# Altium PCB Ctrl.PcbDoc
Units mm, origin at the board's own origin, x right, y up, seen from the top; angles counter-clockwise.
Board outline 152.4 x 101.6 mm, 2 copper layers (Top Layer, Bottom Layer), stack 1.671 mm thick; 13 components, 113 nets, 140 pads, 207 vias.
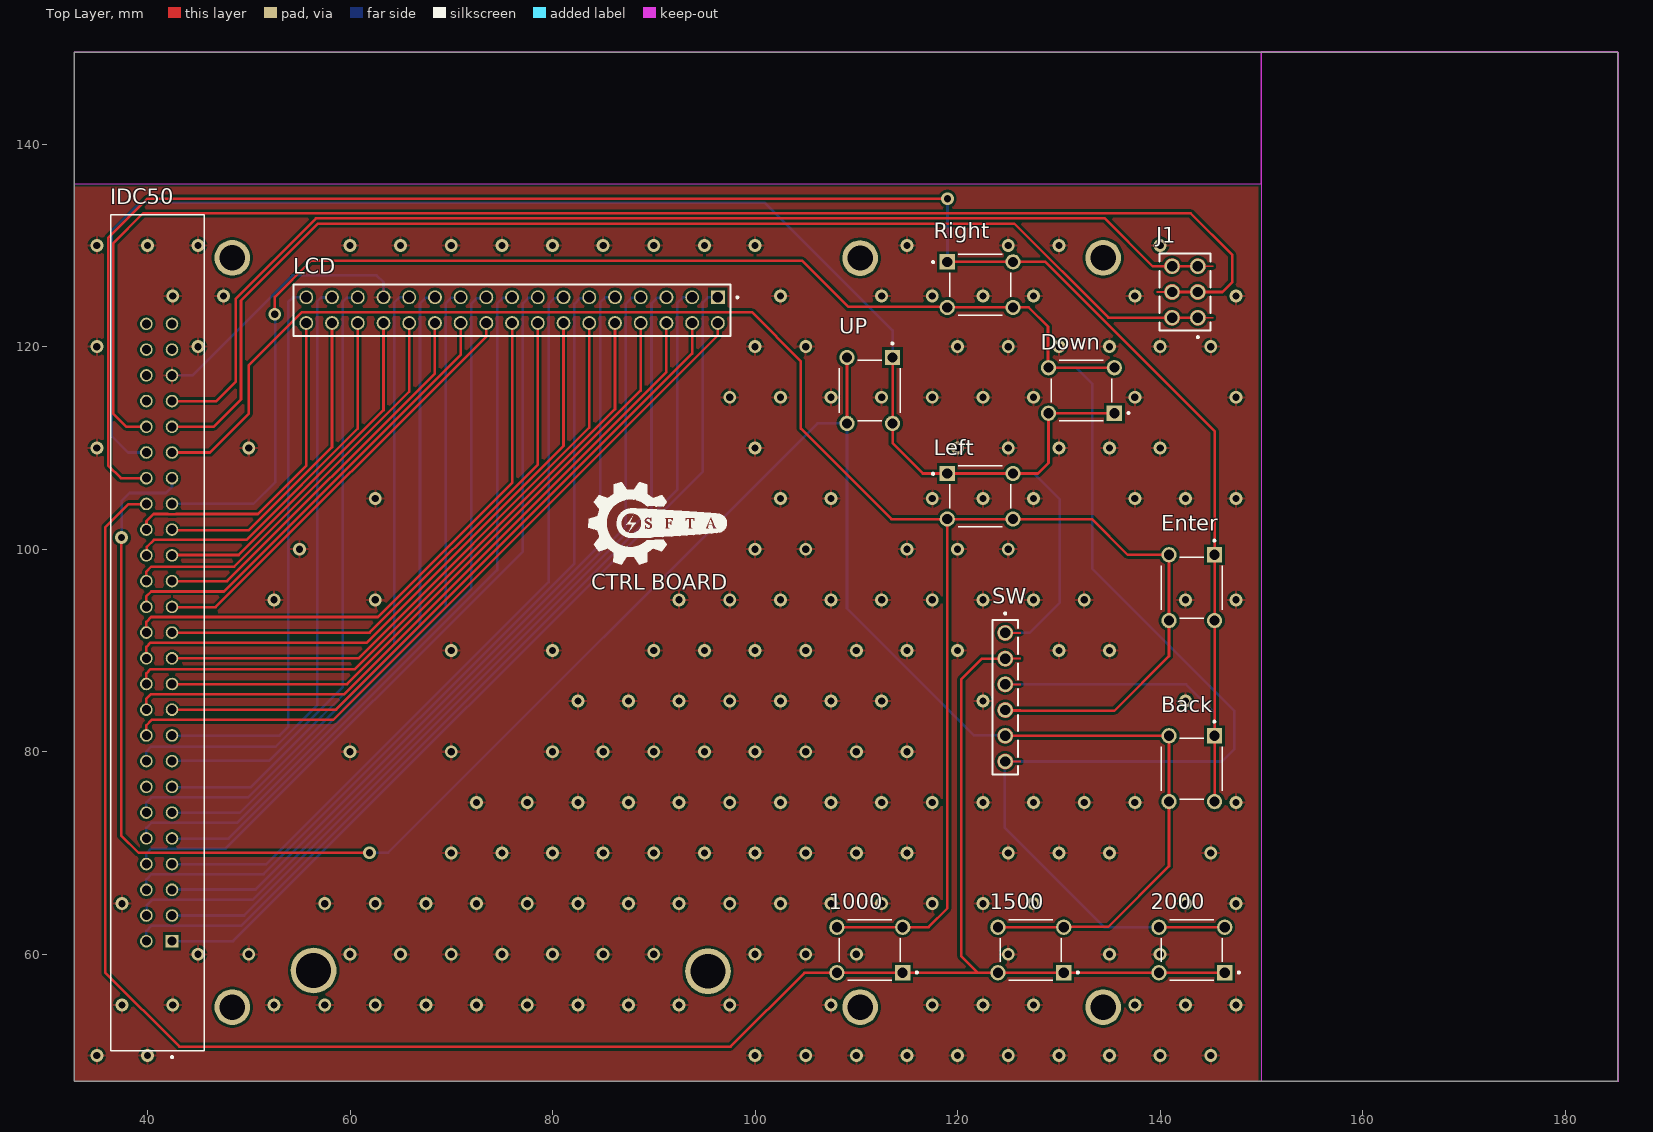
[diagram p0: Top Layer view]
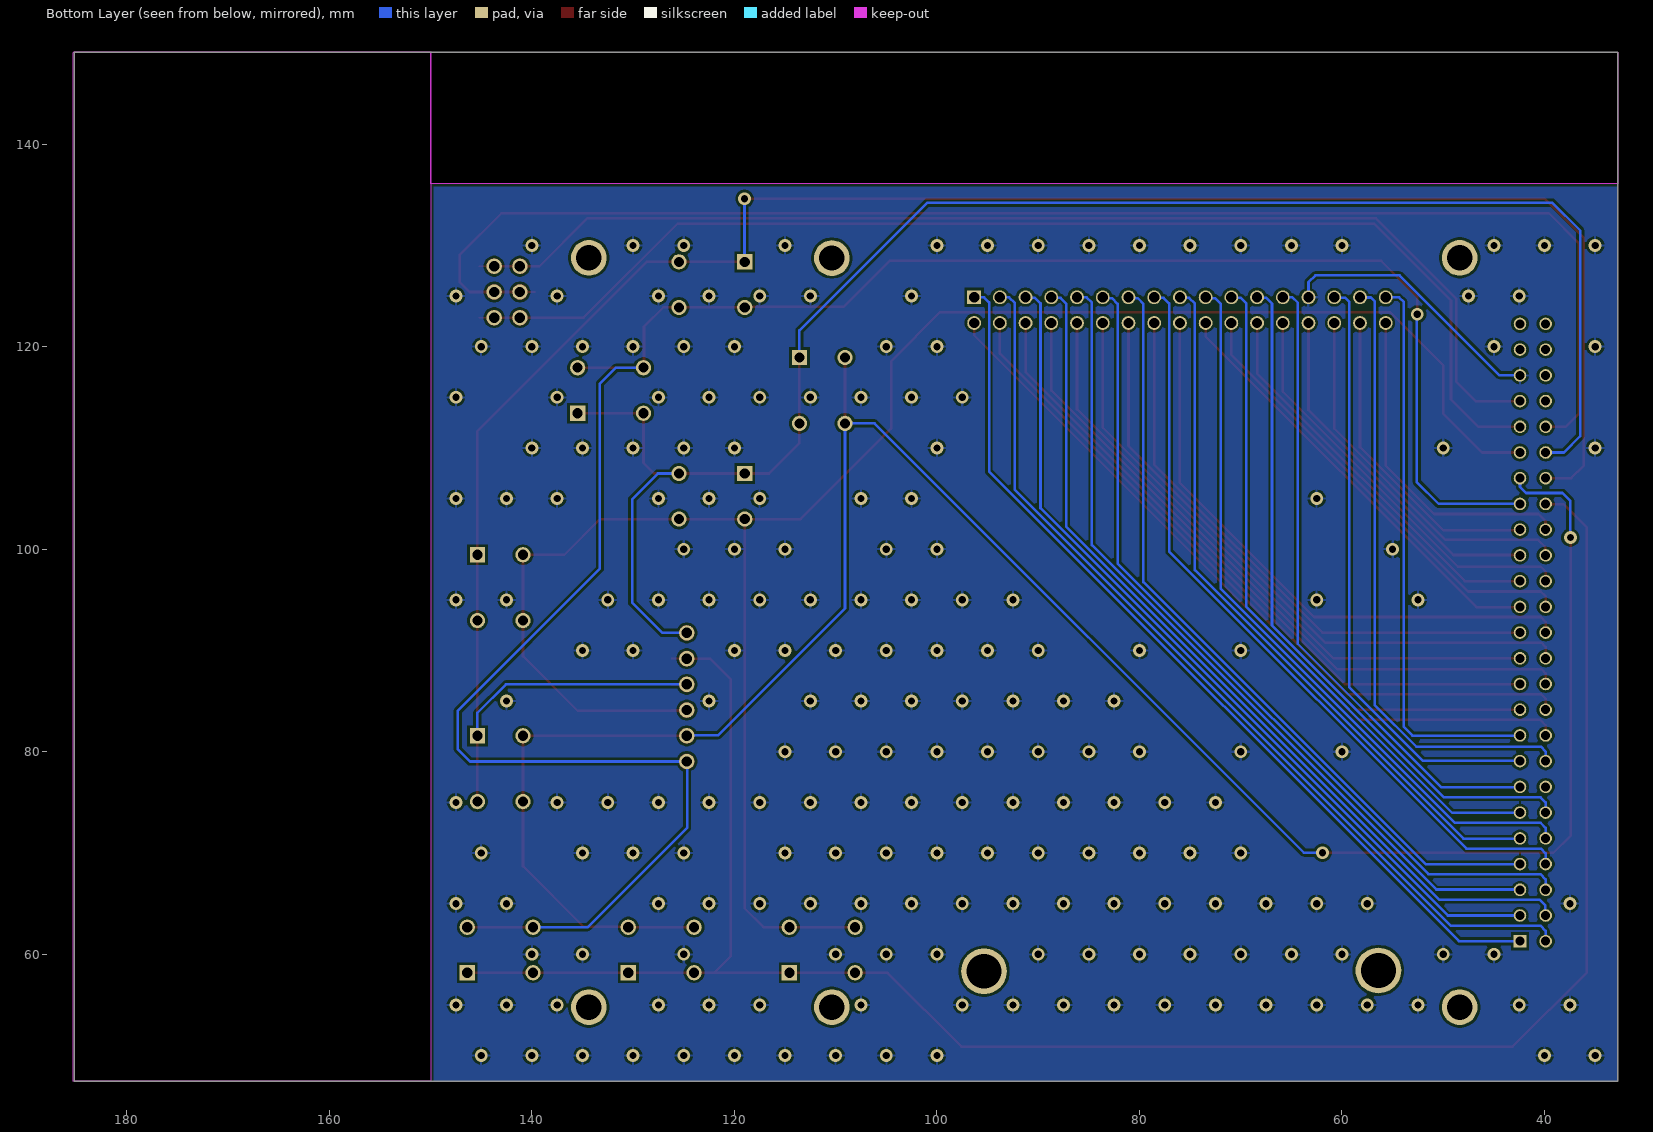
[diagram p1: Bottom Layer view, seen from below]
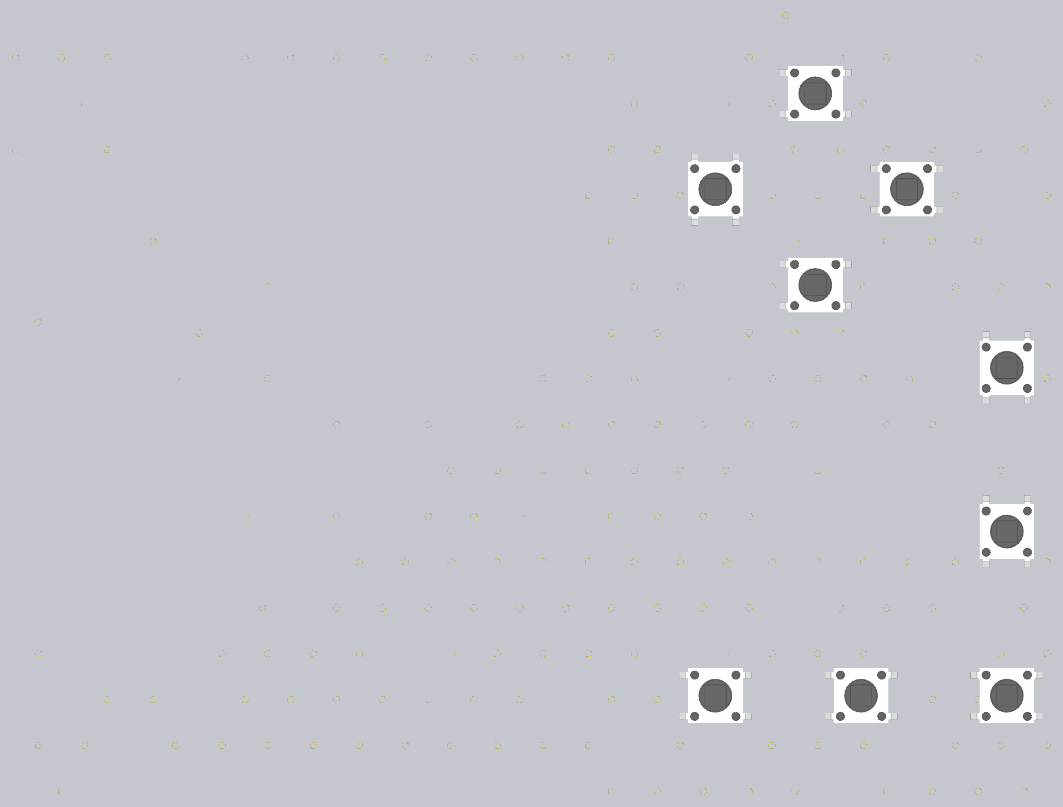
[diagram p2: 3D render of the assembled board from above, using the file's embedded part models]

## Layer stack, top to bottom
Top Solder: solder mask 0.0102, Solder Resist, Dk 3.5
Top Layer: signal copper 0.0356
Dielectric 1: dielectric 1.6, FR-4, Dk 4.8
Bottom Layer: signal copper 0.0356
Bottom Solder: solder mask 0.0102, Solder Resist, Dk 3.5

## Board outline
32.781,47.469 185.181,47.469 185.181,149.069 32.781,149.069
cut-out: 149.962,149.087 149.962,47.487 150,47.45 185.275,47.45 185.275,149.025 185.2,149.1 149.975,149.1
cut-out: 32.775,136.075 149.975,136.075 149.975,149.1 149.95,149.075 32.775,149.075

## Design rules (kind name [scope] priority, off if disabled: settings)
AssemblyTestPointUsage [All] p1: isadvanced=TRUE
AssemblyTestpoint [All] p1: isadvanced=TRUE testpointundercomponent=TRUE minsize=1.016 maxsize=2.54 preferedsize=1.524 minholesize=0 maxholesize=1.016 preferedholesize=0.813 testpointgrid=0.025 usegrid=TRUE gridtolerance=0 allowsidetop=TRUE allowsidebottom=TRUE
Clearance Clearance_1 [OnMid vs OnMid] p1: gap=0.254 ignorepadtopadclearanceinfootprint=FALSE sourcerule=37 cellrowname=All cellrowtype=0 cellcolname=All cellcoltype=0 innerlayers=TRUE
Clearance Clearance_2 [(ExistsOnLayer('Top Layer') Or ExistsOnLayer('Bottom Layer')) vs (ExistsOnLayer('Top Layer') Or ExistsOnLayer('Bottom Layer'))] p2: gap=0.254 ignorepadtopadclearanceinfootprint=FALSE sourcerule=37 cellrowname=All cellrowtype=0 cellcolname=All cellcoltype=0 outerlayers=TRUE
Clearance [All] p3: gap=0.254 ignorepadtopadclearanceinfootprint=FALSE ismatrix=TRUE
ComponentClearance [All] p1: isadvanced=TRUE gap=0.254 collisioncheckmode=3 verticalgap=0.254 showdistances=FALSE
FabricationTestPointUsage [All] p1: isadvanced=TRUE valid=0 allowmultiple=FALSE
FabricationTestpoint [All] p1: isadvanced=TRUE side=3 testpointundercomponent=TRUE minsize=1.016 maxsize=2.54 preferedsize=1.524 minholesize=0 maxholesize=1.016 preferedholesize=0.813 testpointgrid=0.025 allowsidetop=TRUE allowsidebottom=TRUE usegrid=TRUE gridtolerance=0
FanoutControl Fanout_BGA [IsBGA] p1: isadvanced=TRUE bgadir=Out bgaviamode=Centered fanoutstyle=Auto fanoutdirection=Alternating viagrid=0.025 // Fanout_BGA (Default Rule)
FanoutControl Fanout_LCC [IsLCC] p2: isadvanced=TRUE bgadir=Out bgaviamode=Centered fanoutstyle=Auto fanoutdirection=Alternating viagrid=0.025 // Fanout_LCC (Default Rule)
FanoutControl Fanout_SOIC [IsSOIC] p3: isadvanced=TRUE bgadir=Out bgaviamode=Centered fanoutstyle=Auto fanoutdirection=Alternating viagrid=0.025 // Fanout_SOIC (Default Rule)
FanoutControl Fanout_Small [(CompPinCount < 5)] p4: isadvanced=TRUE bgadir=Out bgaviamode=Centered fanoutstyle=Auto fanoutdirection=OutThenIn viagrid=0.025 // Fanout_Small (Default Rule)
FanoutControl Fanout_Default [All] p5: isadvanced=TRUE bgadir=Out bgaviamode=Centered fanoutstyle=Auto fanoutdirection=Alternating viagrid=0.025 // Fanout_Default (Default Rule)
Height [All] p1: isadvanced=TRUE minheight=0 maxheight=25.4 prefheight=12.7
HoleSize [All] p1: isadvanced=TRUE absolutevalues=TRUE maxlimit=2.54 minlimit=0.025 maxpercent=80.000 minpercent=20.000
HoleToHoleClearance [All] p1: isadvanced=TRUE gap=0.254 allowstackedmicrovias=TRUE
LayerPairs [All] p1: isadvanced=TRUE enforce=TRUE
MinimumSolderMaskSliver [All] p1: isadvanced=TRUE minsoldermaskwidth=0.254
NetAntennae [All] p1: isadvanced=TRUE netantennaetolerance=0
PasteMaskExpansion [All] p1: isadvanced=TRUE expansion=0
PlaneClearance [All] p1: isadvanced=TRUE clearance=0.508
PlaneConnect [All] p1: isadvanced=TRUE planeconnectstyle=Relief reliefexpansion=0.508 reliefentries=4 reliefconductorwidth=0.254 reliefairgap=0.254
PolygonConnect [All] p1: connectstyle=Relief reliefconductorwidth=0.254 reliefentries=4 polygonreliefangle="90 Angle" airgapwidth=0.254
RoutingCorners [All] p1: isadvanced=TRUE cornerstyle=45-Degree minsetback=2.54 maxsetback=2.54
RoutingPriority [All] p1: isadvanced=TRUE routingpriority=0
RoutingVias [All] p1: holewidth=0.711 width=1.27 viastyle="Through Hole" minholewidth=0.711 minwidth=1.27 maxholewidth=0.711 maxwidth=1.27
ShortCircuit [All] p1: isadvanced=TRUE allowed=FALSE
SilkToSilkClearance [All] p1: isadvanced=TRUE silktosilkclearance=0.254
SilkToSolderMaskClearance [IsPad] p1: isadvanced=TRUE minsilkscreentomaskgap=0.254 clearancetoexposedcopper=TRUE
SolderMaskExpansion [All] p1: isadvanced=TRUE expansion=0.102 istentingtop=FALSE
SupplyNets "Schematic Supply Nets_1" [InNet('+12')] p1: voltage=0.000
UnRoutedNet [All] p1: isadvanced=TRUE
UnpouredPolygon [All] p1: isadvanced=TRUE
Width [All] p1: maxlimit=0.254 minlimit=0.254 preferedwidth=0.254
4 further rules are at their usual default settings.

## Classes and differential pairs
component class U_ZK-SJ20: zk
component class U_dc_to_dc: dc_dc
component class U_BordBox: IDC50
component class U_Ctrl: 1500 2000 Back Down Enter J1 Left Right SW UP

## Components (designator, comment, footprint, x,y, rotation, side; value= is the part's Value field where it differs from the comment)
1000 "9" SW_TS01-66-73-BK-100-D 111.325,60.425 r180 top
1500 "8" SW_TS01-66-73-BK-100-D 127.225,60.425 r180 top
2000 "7" SW_TS01-66-73-BK-100-D 143.125,60.425 r180 top
Back "6" SW_TS01-66-73-BK-100-D 143.125,78.325 r270 top
Down "3" SW_TS01-66-73-BK-100-D 132.225,115.675 r180 top
Enter "5" SW_TS01-66-73-BK-100-D 143.125,96.2 r270 top
IDC50 "1-1761686-5" TE_1-1761686-5 42.425,61.29 r90 top
J1 "MTLW-103-07-L-D-320" SAMTEC_MTLW-103-07-L-D-320 142.45,125.4 r90 top
LCD "TSW-117-23-G-D" SAMTEC_TSW-117-23-G-D 96.325,124.875 r180 top
Left "2" SW_TS01-66-73-BK-100-D 122.225,105.225 r0 top
Right "4" SW_TS01-66-73-BK-100-D 122.225,126.125 r0 top
SW "MTLW-106-05-T-S-137" SAMTEC_MTLW-106-05-T-S-137 124.7,85.385 r90 top
UP "1" SW_TS01-66-73-BK-100-D 111.325,115.675 r270 top

## Footprints (in the part's own frame and the unit in brackets; to place one, negate y for a bottom-side part, rotate by r counter-clockwise, add the part's x,y. Pads: shape width x height; smd on the part's side, far side on the other; paste and mask are expansions set on the pad)
SAMTEC_MTLW-103-07-L-D-320 [mm]
  round 1.52 hole 1.02: 01(-2.54,-1.27) 02(-2.54,1.27) 03(0,-1.27) 04(0,1.27) 05(2.54,-1.27) 06(2.54,1.27)
  Top Layer region: -2.461,-0.514 -2.382,-0.527 -2.305,-0.547 -2.231,-0.576 -2.16,-0.612 -2.093,-0.655 -2.031,-0.705 -1.975,-0.761 -1.925,-0.823 -1.882,-0.89 -1.846,-0.961 -1.817,-1.035 -1.797,-1.112 -1.784,-1.191 -1.78,-1.27 -1.781,-1.308 -1.784,-1.346 -1.788,-1.383 -1.795,-1.421 -1.803,-1.457 -1.813,-1.494 -1.825,-1.529 -1.839,-1.564 -1.854,-1.599 -1.871,-1.633 -1.89,-1.665 -1.91,-1.697 -1.932,-1.728 -1.955,-1.757 -1.98,-1.786 -2.006,-1.813 -2.034,-1.839 -2.063,-1.863 -2.092,-1.886 -2.123,-1.908 -2.155,-1.928 -2.188,-1.946 -2.222,-1.962 -2.257,-1.977 -2.292,-1.991 -2.328,-2.002 -2.364,-2.012 -2.401,-2.02 -2.438,-2.026 -2.475,-2.03 -2.475,-2.8 -2.605,-2.8 -2.605,-2.03 -2.642,-2.026 -2.679,-2.02 -2.716,-2.012 -2.752,-2.002 -2.788,-1.991 -2.823,-1.977 -2.858,-1.962 -2.892,-1.946 -2.925,-1.928 -2.957,-1.908 -2.988,-1.886 -3.017,-1.863 -3.046,-1.839 -3.074,-1.813 -3.1,-1.786 -3.125,-1.757 -3.148,-1.728 -3.17,-1.697 -3.19,-1.665 -3.209,-1.633 -3.226,-1.599 -3.241,-1.564 -3.255,-1.529 -3.267,-1.494 -3.277,-1.457 -3.285,-1.421 -3.292,-1.383 -3.296,-1.346 -3.299,-1.308 -3.3,-1.27 -3.296,-1.191 -3.283,-1.112 -3.263,-1.035 -3.234,-0.961 -3.198,-0.89 -3.155,-0.823 -3.105,-0.761 -3.049,-0.705 -2.987,-0.655 -2.92,-0.612 -2.849,-0.576 -2.775,-0.547 -2.698,-0.527 -2.619,-0.514 -2.54,-0.51
  Top Layer region: -2.475,2.03 -2.446,2.027 -2.412,2.022 -2.377,2.016 -2.343,2.008 -2.31,1.998 -2.277,1.987 -2.244,1.975 -2.212,1.961 -2.181,1.945 -2.15,1.928 -2.12,1.91 -2.091,1.89 -2.064,1.869 -2.037,1.847 -2.011,1.823 -1.986,1.799 -1.962,1.773 -1.94,1.746 -1.919,1.718 -1.899,1.69 -1.88,1.66 -1.863,1.63 -1.847,1.598 -1.833,1.566 -1.82,1.534 -1.809,1.501 -1.799,1.467 -1.791,1.433 -1.784,1.399 -1.78,1.37 -1.78,1.27 -1.781,1.23 -1.784,1.191 -1.789,1.151 -1.797,1.112 -1.806,1.073 -1.817,1.035 -1.83,0.998 -1.846,0.961 -1.863,0.925 -1.882,0.89 -1.903,0.856 -1.925,0.823 -1.949,0.792 -1.975,0.761 -2.003,0.733 -2.031,0.705 -2.062,0.679 -2.093,0.655 -2.126,0.633 -2.16,0.612 -2.195,0.593 -2.231,0.576 -2.268,0.56 -2.305,0.547 -2.343,0.536 -2.382,0.527 -2.421,0.519 -2.461,0.514 -2.5,0.511 -2.54,0.51 -2.58,0.511 -2.619,0.514 -2.659,0.519 -2.698,0.527 -2.737,0.536 -2.775,0.547 -2.812,0.56 -2.849,0.576 -2.885,0.593 -2.92,0.612 -2.954,0.633 -2.987,0.655 -3.018,0.679 -3.049,0.705 -3.077,0.733 -3.105,0.761 -3.131,0.792 -3.155,0.823 -3.177,0.856 -3.198,0.89 -3.217,0.925 -3.234,0.961 -3.25,0.998 -3.263,1.035 -3.274,1.073 -3.283,1.112 -3.291,1.151 -3.296,1.191 -3.299,1.23 -3.3,1.27 -3.3,1.37 -3.296,1.399 -3.289,1.433 -3.281,1.467 -3.271,1.501 -3.26,1.534 -3.247,1.566 -3.233,1.598 -3.217,1.63 -3.2,1.66 -3.181,1.69 -3.161,1.718 -3.14,1.746 -3.118,1.773 -3.094,1.799 -3.069,1.823 -3.043,1.847 -3.016,1.869 -2.989,1.89 -2.96,1.91 -2.93,1.928 -2.899,1.945 -2.868,1.961 -2.836,1.975 -2.803,1.987 -2.77,1.998 -2.737,2.008 -2.703,2.016 -2.668,2.022 -2.634,2.027 -2.605,2.03 -2.605,2.8 -2.475,2.8
  Top Layer region: 0.079,-0.514 0.158,-0.527 0.235,-0.547 0.309,-0.576 0.38,-0.612 0.447,-0.655 0.509,-0.705 0.565,-0.761 0.615,-0.823 0.658,-0.89 0.694,-0.961 0.723,-1.035 0.743,-1.112 0.756,-1.191 0.76,-1.27 0.759,-1.308 0.756,-1.346 0.752,-1.383 0.745,-1.421 0.737,-1.457 0.727,-1.494 0.715,-1.529 0.701,-1.564 0.686,-1.599 0.669,-1.633 0.65,-1.665 0.63,-1.697 0.608,-1.728 0.585,-1.757 0.56,-1.786 0.534,-1.813 0.506,-1.839 0.477,-1.863 0.448,-1.886 0.417,-1.908 0.385,-1.928 0.352,-1.946 0.318,-1.962 0.283,-1.977 0.248,-1.991 0.212,-2.002 0.176,-2.012 0.139,-2.02 0.102,-2.026 0.065,-2.03 0.065,-2.8 -0.065,-2.8 -0.065,-2.03 -0.102,-2.026 -0.139,-2.02 -0.176,-2.012 -0.212,-2.002 -0.248,-1.991 -0.283,-1.977 -0.318,-1.962 -0.352,-1.946 -0.385,-1.928 -0.417,-1.908 -0.448,-1.886 -0.477,-1.863 -0.506,-1.839 -0.534,-1.813 -0.56,-1.786 -0.585,-1.757 -0.608,-1.728 -0.63,-1.697 -0.65,-1.665 -0.669,-1.633 -0.686,-1.599 -0.701,-1.564 -0.715,-1.529 -0.727,-1.494 -0.737,-1.457 -0.745,-1.421 -0.752,-1.383 -0.756,-1.346 -0.759,-1.308 -0.76,-1.27 -0.756,-1.191 -0.743,-1.112 -0.723,-1.035 -0.694,-0.961 -0.658,-0.89 -0.615,-0.823 -0.565,-0.761 -0.509,-0.705 -0.447,-0.655 -0.38,-0.612 -0.309,-0.576 -0.235,-0.547 -0.158,-0.527 -0.079,-0.514 0,-0.51
  Top Layer region: 0.065,2.03 0.094,2.027 0.128,2.022 0.163,2.016 0.197,2.008 0.23,1.998 0.263,1.987 0.296,1.975 0.328,1.961 0.359,1.945 0.39,1.928 0.42,1.91 0.449,1.89 0.476,1.869 0.503,1.847 0.529,1.823 0.554,1.799 0.578,1.773 0.6,1.746 0.621,1.718 0.641,1.69 0.66,1.66 0.677,1.63 0.693,1.598 0.707,1.566 0.72,1.534 0.731,1.501 0.741,1.467 0.749,1.433 0.756,1.399 0.76,1.37 0.76,1.27 0.759,1.23 0.756,1.191 0.751,1.151 0.743,1.112 0.734,1.073 0.723,1.035 0.71,0.998 0.694,0.961 0.677,0.925 0.658,0.89 0.637,0.856 0.615,0.823 0.591,0.792 0.565,0.761 0.537,0.733 0.509,0.705 0.478,0.679 0.447,0.655 0.414,0.633 0.38,0.612 0.345,0.593 0.309,0.576 0.272,0.56 0.235,0.547 0.197,0.536 0.158,0.527 0.119,0.519 0.079,0.514 0.04,0.511 0,0.51 -0.04,0.511 -0.079,0.514 -0.119,0.519 -0.158,0.527 -0.197,0.536 -0.235,0.547 -0.272,0.56 -0.309,0.576 -0.345,0.593 -0.38,0.612 -0.414,0.633 -0.447,0.655 -0.478,0.679 -0.509,0.705 -0.537,0.733 -0.565,0.761 -0.591,0.792 -0.615,0.823 -0.637,0.856 -0.658,0.89 -0.677,0.925 -0.694,0.961 -0.71,0.998 -0.723,1.035 -0.734,1.073 -0.743,1.112 -0.751,1.151 -0.756,1.191 -0.759,1.23 -0.76,1.27 -0.76,1.37 -0.756,1.399 -0.749,1.433 -0.741,1.467 -0.731,1.501 -0.72,1.534 -0.707,1.566 -0.693,1.598 -0.677,1.63 -0.66,1.66 -0.641,1.69 -0.621,1.718 -0.6,1.746 -0.578,1.773 -0.554,1.799 -0.529,1.823 -0.503,1.847 -0.476,1.869 -0.449,1.89 -0.42,1.91 -0.39,1.928 -0.359,1.945 -0.328,1.961 -0.296,1.975 -0.263,1.987 -0.23,1.998 -0.197,2.008 -0.163,2.016 -0.128,2.022 -0.094,2.027 -0.065,2.03 -0.065,2.8 0.065,2.8
  Top Layer region: 2.619,-0.514 2.698,-0.527 2.775,-0.547 2.849,-0.576 2.92,-0.612 2.987,-0.655 3.049,-0.705 3.105,-0.761 3.155,-0.823 3.198,-0.89 3.234,-0.961 3.263,-1.035 3.283,-1.112 3.296,-1.191 3.3,-1.27 3.299,-1.308 3.296,-1.346 3.292,-1.383 3.285,-1.421 3.277,-1.457 3.267,-1.494 3.255,-1.529 3.241,-1.564 3.226,-1.599 3.209,-1.633 3.19,-1.665 3.17,-1.697 3.148,-1.728 3.125,-1.757 3.1,-1.786 3.074,-1.813 3.046,-1.839 3.017,-1.863 2.988,-1.886 2.957,-1.908 2.925,-1.928 2.892,-1.946 2.858,-1.962 2.823,-1.977 2.788,-1.991 2.752,-2.002 2.716,-2.012 2.679,-2.02 2.642,-2.026 2.605,-2.03 2.605,-2.8 2.475,-2.8 2.475,-2.03 2.438,-2.026 2.401,-2.02 2.364,-2.012 2.328,-2.002 2.292,-1.991 2.257,-1.977 2.222,-1.962 2.188,-1.946 2.155,-1.928 2.123,-1.908 2.092,-1.886 2.063,-1.863 2.034,-1.839 2.006,-1.813 1.98,-1.786 1.955,-1.757 1.932,-1.728 1.91,-1.697 1.89,-1.665 1.871,-1.633 1.854,-1.599 1.839,-1.564 1.825,-1.529 1.813,-1.494 1.803,-1.457 1.795,-1.421 1.788,-1.383 1.784,-1.346 1.781,-1.308 1.78,-1.27 1.784,-1.191 1.797,-1.112 1.817,-1.035 1.846,-0.961 1.882,-0.89 1.925,-0.823 1.975,-0.761 2.031,-0.705 2.093,-0.655 2.16,-0.612 2.231,-0.576 2.305,-0.547 2.382,-0.527 2.461,-0.514 2.54,-0.51
  Top Layer region: 2.605,2.03 2.634,2.027 2.668,2.022 2.703,2.016 2.737,2.008 2.77,1.998 2.803,1.987 2.836,1.975 2.868,1.961 2.899,1.945 2.93,1.928 2.96,1.91 2.989,1.89 3.016,1.869 3.043,1.847 3.069,1.823 3.094,1.799 3.118,1.773 3.14,1.746 3.161,1.718 3.181,1.69 3.2,1.66 3.217,1.63 3.233,1.598 3.247,1.566 3.26,1.534 3.271,1.501 3.281,1.467 3.289,1.433 3.296,1.399 3.3,1.37 3.3,1.27 3.299,1.23 3.296,1.191 3.291,1.151 3.283,1.112 3.274,1.073 3.263,1.035 3.25,0.998 3.234,0.961 3.217,0.925 3.198,0.89 3.177,0.856 3.155,0.823 3.131,0.792 3.105,0.761 3.077,0.733 3.049,0.705 3.018,0.679 2.987,0.655 2.954,0.633 2.92,0.612 2.885,0.593 2.849,0.576 2.812,0.56 2.775,0.547 2.737,0.536 2.698,0.527 2.659,0.519 2.619,0.514 2.58,0.511 2.54,0.51 2.5,0.511 2.461,0.514 2.421,0.519 2.382,0.527 2.343,0.536 2.305,0.547 2.268,0.56 2.231,0.576 2.195,0.593 2.16,0.612 2.126,0.633 2.093,0.655 2.062,0.679 2.031,0.705 2.003,0.733 1.975,0.761 1.949,0.792 1.925,0.823 1.903,0.856 1.882,0.89 1.863,0.925 1.846,0.961 1.83,0.998 1.817,1.035 1.806,1.073 1.797,1.112 1.789,1.151 1.784,1.191 1.781,1.23 1.78,1.27 1.78,1.37 1.784,1.399 1.791,1.433 1.799,1.467 1.809,1.501 1.82,1.534 1.833,1.566 1.847,1.598 1.863,1.63 1.88,1.66 1.899,1.69 1.919,1.718 1.94,1.746 1.962,1.773 1.986,1.799 2.011,1.823 2.037,1.847 2.064,1.869 2.091,1.89 2.12,1.91 2.15,1.928 2.181,1.945 2.212,1.961 2.244,1.975 2.277,1.987 2.31,1.998 2.343,2.008 2.377,2.016 2.412,2.022 2.446,2.027 2.475,2.03 2.475,2.8 2.605,2.8
  silkscreen extent -4.56,-2.51 3.81,2.51
SAMTEC_MTLW-106-05-T-S-137 [mm]
  round 1.52 hole 1.02: 01(6.35,0) 02(3.81,0) 03(1.27,0) 04(-1.27,0) 05(-3.81,0) 06(-6.35,0)
  Top Layer region: -1.191,0.756 -1.112,0.743 -1.035,0.723 -0.961,0.694 -0.89,0.658 -0.823,0.615 -0.761,0.565 -0.705,0.509 -0.655,0.447 -0.612,0.38 -0.576,0.309 -0.547,0.235 -0.527,0.158 -0.514,0.079 -0.51,0 -0.511,-0.038 -0.514,-0.076 -0.518,-0.113 -0.525,-0.151 -0.533,-0.187 -0.543,-0.224 -0.555,-0.259 -0.569,-0.294 -0.584,-0.329 -0.601,-0.363 -0.62,-0.395 -0.64,-0.427 -0.662,-0.458 -0.685,-0.487 -0.71,-0.516 -0.736,-0.543 -0.764,-0.569 -0.793,-0.593 -0.822,-0.616 -0.853,-0.638 -0.885,-0.658 -0.918,-0.676 -0.952,-0.692 -0.987,-0.707 -1.022,-0.721 -1.058,-0.732 -1.094,-0.742 -1.131,-0.75 -1.168,-0.756 -1.205,-0.76 -1.205,-1.53 -1.335,-1.53 -1.335,-0.76 -1.372,-0.756 -1.409,-0.75 -1.446,-0.742 -1.482,-0.732 -1.518,-0.721 -1.553,-0.707 -1.588,-0.692 -1.622,-0.676 -1.655,-0.658 -1.687,-0.638 -1.718,-0.616 -1.747,-0.593 -1.776,-0.569 -1.804,-0.543 -1.83,-0.516 -1.855,-0.487 -1.878,-0.458 -1.9,-0.427 -1.92,-0.395 -1.939,-0.363 -1.956,-0.329 -1.971,-0.294 -1.985,-0.259 -1.997,-0.224 -2.007,-0.187 -2.015,-0.151 -2.022,-0.113 -2.026,-0.076 -2.029,-0.038 -2.03,0 -2.026,0.079 -2.013,0.158 -1.993,0.235 -1.964,0.309 -1.928,0.38 -1.885,0.447 -1.835,0.509 -1.779,0.565 -1.717,0.615 -1.65,0.658 -1.579,0.694 -1.505,0.723 -1.428,0.743 -1.349,0.756 -1.27,0.76
  Top Layer region: 3.889,0.756 3.968,0.743 4.045,0.723 4.119,0.694 4.19,0.658 4.257,0.615 4.319,0.565 4.375,0.509 4.425,0.447 4.468,0.38 4.504,0.309 4.533,0.235 4.553,0.158 4.566,0.079 4.57,0 4.569,-0.038 4.566,-0.076 4.562,-0.113 4.555,-0.151 4.547,-0.187 4.537,-0.224 4.525,-0.259 4.511,-0.294 4.496,-0.329 4.479,-0.363 4.46,-0.395 4.44,-0.427 4.418,-0.458 4.395,-0.487 4.37,-0.516 4.344,-0.543 4.316,-0.569 4.287,-0.593 4.258,-0.616 4.227,-0.638 4.195,-0.658 4.162,-0.676 4.128,-0.692 4.093,-0.707 4.058,-0.721 4.022,-0.732 3.986,-0.742 3.949,-0.75 3.912,-0.756 3.875,-0.76 3.875,-1.53 3.745,-1.53 3.745,-0.76 3.708,-0.756 3.671,-0.75 3.634,-0.742 3.598,-0.732 3.562,-0.721 3.527,-0.707 3.492,-0.692 3.458,-0.676 3.425,-0.658 3.393,-0.638 3.362,-0.616 3.333,-0.593 3.304,-0.569 3.276,-0.543 3.25,-0.516 3.225,-0.487 3.202,-0.458 3.18,-0.427 3.16,-0.395 3.141,-0.363 3.124,-0.329 3.109,-0.294 3.095,-0.259 3.083,-0.224 3.073,-0.187 3.065,-0.151 3.058,-0.113 3.054,-0.076 3.051,-0.038 3.05,0 3.054,0.079 3.067,0.158 3.087,0.235 3.116,0.309 3.152,0.38 3.195,0.447 3.245,0.509 3.301,0.565 3.363,0.615 3.43,0.658 3.501,0.694 3.575,0.723 3.652,0.743 3.731,0.756 3.81,0.76
  Top Layer region: 6.429,0.756 6.508,0.743 6.585,0.723 6.659,0.694 6.73,0.658 6.797,0.615 6.859,0.565 6.915,0.509 6.965,0.447 7.008,0.38 7.044,0.309 7.073,0.235 7.093,0.158 7.106,0.079 7.11,0 7.109,-0.038 7.106,-0.076 7.102,-0.113 7.095,-0.151 7.087,-0.187 7.077,-0.224 7.065,-0.259 7.051,-0.294 7.036,-0.329 7.019,-0.363 7,-0.395 6.98,-0.427 6.958,-0.458 6.935,-0.487 6.91,-0.516 6.884,-0.543 6.856,-0.569 6.827,-0.593 6.798,-0.616 6.767,-0.638 6.735,-0.658 6.702,-0.676 6.668,-0.692 6.633,-0.707 6.598,-0.721 6.562,-0.732 6.526,-0.742 6.489,-0.75 6.452,-0.756 6.415,-0.76 6.415,-1.53 6.285,-1.53 6.285,-0.76 6.248,-0.756 6.211,-0.75 6.174,-0.742 6.138,-0.732 6.102,-0.721 6.067,-0.707 6.032,-0.692 5.998,-0.676 5.965,-0.658 5.933,-0.638 5.902,-0.616 5.873,-0.593 5.844,-0.569 5.816,-0.543 5.79,-0.516 5.765,-0.487 5.742,-0.458 5.72,-0.427 5.7,-0.395 5.681,-0.363 5.664,-0.329 5.649,-0.294 5.635,-0.259 5.623,-0.224 5.613,-0.187 5.605,-0.151 5.598,-0.113 5.594,-0.076 5.591,-0.038 5.59,0 5.594,0.079 5.607,0.158 5.627,0.235 5.656,0.309 5.692,0.38 5.735,0.447 5.785,0.509 5.841,0.565 5.903,0.615 5.97,0.658 6.041,0.694 6.115,0.723 6.192,0.743 6.271,0.756 6.35,0.76
  Top Layer region: 1.349,0.756 1.428,0.743 1.505,0.723 1.579,0.694 1.65,0.658 1.717,0.615 1.779,0.565 1.835,0.509 1.885,0.447 1.928,0.38 1.964,0.309 1.993,0.235 2.013,0.158 2.026,0.079 2.03,0 2.029,-0.038 2.026,-0.076 2.022,-0.113 2.015,-0.151 2.007,-0.187 1.997,-0.224 1.985,-0.259 1.971,-0.294 1.956,-0.329 1.939,-0.363 1.92,-0.395 1.9,-0.427 1.878,-0.458 1.855,-0.487 1.83,-0.516 1.804,-0.543 1.776,-0.569 1.747,-0.593 1.718,-0.616 1.687,-0.638 1.655,-0.658 1.622,-0.676 1.588,-0.692 1.553,-0.707 1.518,-0.721 1.482,-0.732 1.446,-0.742 1.409,-0.75 1.372,-0.756 1.335,-0.76 1.335,-1.53 1.205,-1.53 1.205,-0.76 1.168,-0.756 1.131,-0.75 1.094,-0.742 1.058,-0.732 1.022,-0.721 0.987,-0.707 0.952,-0.692 0.918,-0.676 0.885,-0.658 0.853,-0.638 0.822,-0.616 0.793,-0.593 0.764,-0.569 0.736,-0.543 0.71,-0.516 0.685,-0.487 0.662,-0.458 0.64,-0.427 0.62,-0.395 0.601,-0.363 0.584,-0.329 0.569,-0.294 0.555,-0.259 0.543,-0.224 0.533,-0.187 0.525,-0.151 0.518,-0.113 0.514,-0.076 0.511,-0.038 0.51,0 0.514,0.079 0.527,0.158 0.547,0.235 0.576,0.309 0.612,0.38 0.655,0.447 0.705,0.509 0.761,0.565 0.823,0.615 0.89,0.658 0.961,0.694 1.035,0.723 1.112,0.743 1.191,0.756 1.27,0.76
  Top Layer region: -3.731,0.756 -3.652,0.743 -3.575,0.723 -3.501,0.694 -3.43,0.658 -3.363,0.615 -3.301,0.565 -3.245,0.509 -3.195,0.447 -3.152,0.38 -3.116,0.309 -3.087,0.235 -3.067,0.158 -3.054,0.079 -3.05,0 -3.051,-0.038 -3.054,-0.076 -3.058,-0.113 -3.065,-0.151 -3.073,-0.187 -3.083,-0.224 -3.095,-0.259 -3.109,-0.294 -3.124,-0.329 -3.141,-0.363 -3.16,-0.395 -3.18,-0.427 -3.202,-0.458 -3.225,-0.487 -3.25,-0.516 -3.276,-0.543 -3.304,-0.569 -3.333,-0.593 -3.362,-0.616 -3.393,-0.638 -3.425,-0.658 -3.458,-0.676 -3.492,-0.692 -3.527,-0.707 -3.562,-0.721 -3.598,-0.732 -3.634,-0.742 -3.671,-0.75 -3.708,-0.756 -3.745,-0.76 -3.745,-1.53 -3.875,-1.53 -3.875,-0.76 -3.912,-0.756 -3.949,-0.75 -3.986,-0.742 -4.022,-0.732 -4.058,-0.721 -4.093,-0.707 -4.128,-0.692 -4.162,-0.676 -4.195,-0.658 -4.227,-0.638 -4.258,-0.616 -4.287,-0.593 -4.316,-0.569 -4.344,-0.543 -4.37,-0.516 -4.395,-0.487 -4.418,-0.458 -4.44,-0.427 -4.46,-0.395 -4.479,-0.363 -4.496,-0.329 -4.511,-0.294 -4.525,-0.259 -4.537,-0.224 -4.547,-0.187 -4.555,-0.151 -4.562,-0.113 -4.566,-0.076 -4.569,-0.038 -4.57,0 -4.566,0.079 -4.553,0.158 -4.533,0.235 -4.504,0.309 -4.468,0.38 -4.425,0.447 -4.375,0.509 -4.319,0.565 -4.257,0.615 -4.19,0.658 -4.119,0.694 -4.045,0.723 -3.968,0.743 -3.889,0.756 -3.81,0.76
  Top Layer region: -6.271,0.756 -6.192,0.743 -6.115,0.723 -6.041,0.694 -5.97,0.658 -5.903,0.615 -5.841,0.565 -5.785,0.509 -5.735,0.447 -5.692,0.38 -5.656,0.309 -5.627,0.235 -5.607,0.158 -5.594,0.079 -5.59,0 -5.591,-0.038 -5.594,-0.076 -5.598,-0.113 -5.605,-0.151 -5.613,-0.187 -5.623,-0.224 -5.635,-0.259 -5.649,-0.294 -5.664,-0.329 -5.681,-0.363 -5.7,-0.395 -5.72,-0.427 -5.742,-0.458 -5.765,-0.487 -5.79,-0.516 -5.816,-0.543 -5.844,-0.569 -5.873,-0.593 -5.902,-0.616 -5.933,-0.638 -5.965,-0.658 -5.998,-0.676 -6.032,-0.692 -6.067,-0.707 -6.102,-0.721 -6.138,-0.732 -6.174,-0.742 -6.211,-0.75 -6.248,-0.756 -6.285,-0.76 -6.285,-1.53 -6.415,-1.53 -6.415,-0.76 -6.452,-0.756 -6.489,-0.75 -6.526,-0.742 -6.562,-0.732 -6.598,-0.721 -6.633,-0.707 -6.668,-0.692 -6.702,-0.676 -6.735,-0.658 -6.767,-0.638 -6.798,-0.616 -6.827,-0.593 -6.856,-0.569 -6.884,-0.543 -6.91,-0.516 -6.935,-0.487 -6.958,-0.458 -6.98,-0.427 -7,-0.395 -7.019,-0.363 -7.036,-0.329 -7.051,-0.294 -7.065,-0.259 -7.077,-0.224 -7.087,-0.187 -7.095,-0.151 -7.102,-0.113 -7.106,-0.076 -7.109,-0.038 -7.11,0 -7.106,0.079 -7.093,0.158 -7.073,0.235 -7.044,0.309 -7.008,0.38 -6.965,0.447 -6.915,0.509 -6.859,0.565 -6.797,0.615 -6.73,0.658 -6.659,0.694 -6.585,0.723 -6.508,0.743 -6.429,0.756 -6.35,0.76
  silkscreen extent -7.62,-1.24 8.37,1.24
SAMTEC_TSW-117-23-G-D [mm]
  rect 1.37x1.37 hole 1.02: 01(0,0)
  round 1.37 hole 1.02: 02(0,2.54) 03(2.54,0) 04(2.54,2.54) 05(5.08,0) 06(5.08,2.54) 07(7.62,0) 08(7.62,2.54) 09(10.16,0) 10(10.16,2.54) 11(12.7,0) 12(12.7,2.54) 13(15.24,0) 14(15.24,2.54) 15(17.78,0) 16(17.78,2.54) 17(20.32,0) 18(20.32,2.54) 19(22.86,0) 20(22.86,2.54) 21(25.4,0) 22(25.4,2.54) 23(27.94,0) 24(27.94,2.54) 25(30.48,0) 26(30.48,2.54) 27(33.02,0) 28(33.02,2.54) 29(35.56,0) 30(35.56,2.54) 31(38.1,0) 32(38.1,2.54) 33(40.64,0) 34(40.64,2.54)
  silkscreen extent -2.02,-1.27 41.91,3.81
SW_TS01-66-73-BK-100-D [mm]
  rect 1.508x1.508 / inner round 1.508 / far side rect 1.508x1.508 hole 1 mask+0.102: 1(-3.25,2.25)
  round 1.508 hole 1 mask+0.102: 2(3.25,2.25) 3(-3.25,-2.25) 4(3.25,-2.25)
  silkscreen extent -4.75,-3 3,3, body extent -3.95,-3 3.95,3, height 7.3
TE_1-1761686-5 [mm]
  rect 1.24x1.24 hole 0.89: 1(0,0)
  round 1.24 hole 0.89: 2(0,2.54) 3(2.54,0) 4(2.54,2.54) 5(5.08,0) 6(5.08,2.54) 7(7.62,0) 8(7.62,2.54) 9(10.16,0) 10(10.16,2.54) 11(12.7,0) 12(12.7,2.54) 13(15.24,0) 14(15.24,2.54) 15(17.78,0) 16(17.78,2.54) 17(20.32,0) 18(20.32,2.54) 19(22.86,0) 20(22.86,2.54) 21(25.4,0) 22(25.4,2.54) 23(27.94,0) 24(27.94,2.54) 25(30.48,0) 26(30.48,2.54) 27(33.02,0) 28(33.02,2.54) 29(35.56,0) 30(35.56,2.54) 31(38.1,0) 32(38.1,2.54) 33(40.64,0) 34(40.64,2.54) 35(43.18,0) 36(43.18,2.54) 37(45.72,0) 38(45.72,2.54) 39(48.26,0) 40(48.26,2.54) 41(50.8,0) 42(50.8,2.54) 43(53.34,0) 44(53.34,2.54) 45(55.88,0) 46(55.88,2.54) 47(58.42,0) 48(58.42,2.54) 49(60.96,0) 50(60.96,2.54)
  silkscreen extent -11.54,-3.18 71.76,6.04

## Part data
1000 1500 2000 Back Down Enter Left Right UP: library part TS01-66-73-BK-100-D, "6 x 6 mm, 7.3 mm Actuator Height, 100 gf, Black, Long Crimped, Through Hole, SPST, Tactile Switch", Package=None, Check_prices=https://www.snapeda.com/parts/TS01-66-73-BK-100-D/Same+Sky/view-part/?ref=eda, MF="Same Sky", MP=TS01-66-73-BK-100-D, SnapEDA_Link=https://www.snapeda.com/parts/TS01-66-73-BK-100-D/Same+Sky/view-part/?ref=snap
IDC50 J1 LCD SW: Package=None, Availability=Unavailable, Price=None
  IDC50: MP=1-1761686-5
  J1: MP=MTLW-103-07-L-D-320
  LCD: MP=TSW-117-23-G-D
  SW: MP=MTLW-106-05-T-S-137

## Free pads (board coordinates)
  round 3.524 hole 2.5: 2(48.375,54.775) 2(48.375,128.775) 2(110.375,54.775) 2(110.375,128.75) 2(134.375,54.775) 2(134.375,128.775)
  round 4.524 hole 3.45: 2(56.4,58.4) 2(95.35,58.325)

## Via types
v1: diameter 1.27, hole 0.711, Top Layer to Bottom Layer, 207 vias

## Nets (pads, with @x,y where several pads share a name; then routed paths per layer and width w, separated by ;. In a path a pad name is that pad's centre, name@x,y a point inside that pad or via, vN(x,y) a via of type N, cw(c..) or ccw(c..) an arc to the next point about the centre after c; other vN are vias at no path point)
1: IDC50.1 LCD.01 | length 90
  Bottom Layer w0.254: IDC50.1 48.451,61.29 94.851,107.69 94.851,124.376 95.35,124.875 LCD.01
2: IDC50.2 LCD.03 | length 91.6
  Bottom Layer w0.254: IDC50.2 39.885,62.297 40.413,62.825 49.267,62.825 92.311,105.869 92.311,124.311 92.868,124.868 93.778,124.868 LCD.03
3: IDC50.3 LCD.05 | length 86
  Bottom Layer w0.254: IDC50.3 49.554,63.83 89.771,104.047 89.771,124.271 90.328,124.828 91.198,124.828 LCD.05
4: IDC50.4 LCD.07 | length 87.6
  Bottom Layer w0.254: IDC50.4 39.918,63.863 39.918,64.831 40.456,65.369 50.374,65.369 87.231,102.226 87.231,124.256 87.788,124.813 88.643,124.813 LCD.07
5: IDC50.5 LCD.09 | length 82
  Bottom Layer w0.254: IDC50.5 42.455,66.4 50.687,66.4 84.691,100.404 84.691,124.341 85.225,124.875 LCD.09
6: IDC50.6 LCD.11 | length 83.6
  Bottom Layer w0.254: IDC50.6 39.885,67.385 40.409,67.909 51.477,67.909 82.151,98.583 82.151,124.226 82.713,124.788 83.538,124.788 LCD.11
7: IDC50.7 LCD.13 | length 77.9
  Bottom Layer w0.254: IDC50.7 42.435,68.9 51.75,68.9 79.611,96.761 79.611,124.236 80.168,124.793 81.003,124.793 LCD.13
8: IDC50.8 LCD.15 | length 76.8
  Bottom Layer w0.254: IDC50.8 39.887,68.912 39.887,69.962 40.35,70.425 47.725,70.425 77.071,99.771 77.071,124.271 77.628,124.828 78.498,124.828 LCD.15
9: IDC50.9 LCD.17 | length 71.1
  Bottom Layer w0.254: IDC50.9 42.45,71.425 48.007,71.425 74.531,97.949 74.531,124.256 75.088,124.813 75.943,124.813 LCD.17
10: IDC50.10 LCD.19 | length 72.8
  Bottom Layer w0.254: IDC50.10 39.885,72.485 40.375,72.975 48.838,72.975 71.991,96.128 71.991,124.241 72.548,124.798 73.388,124.798 LCD.19
11: IDC50.11 LCD.21 | length 67.1
  Bottom Layer w0.254: IDC50.11 42.44,73.975 49.12,73.975 69.451,94.306 69.451,124.276 70.008,124.833 70.883,124.833 LCD.21
12: IDC50.12 LCD.23 | length 68.8
  Bottom Layer w0.254: IDC50.12 39.891,73.996 39.891,74.991 40.4,75.5 49.926,75.5 66.911,92.485 66.911,124.261 67.468,124.818 68.328,124.818 LCD.23
13: IDC50.13 LCD.25 | length 63.2
  Bottom Layer w0.254: IDC50.13 42.455,76.5 50.208,76.5 64.371,90.663 64.371,124.346 64.9,124.875 LCD.25
15: IDC50.15 LCD.29 | length 59.6
  Bottom Layer w0.254: IDC50.15 42.455,79.1 51.987,79.1 59.291,86.404 59.291,122.777 59.275,122.793 59.275,124.417 59.699,124.841 60.731,124.841 LCD.29
16: IDC50.16 LCD.31 | length 61.2
  Bottom Layer w0.254: IDC50.16 39.885,80.015 40.37,80.5 52.668,80.5 56.751,84.583 56.751,122.777 56.75,122.778 56.75,124.45 57.159,124.859 58.209,124.859 LCD.31
17: IDC50.17 LCD.33 | length 55.8
  Bottom Layer w0.254: IDC50.17 42.435,81.6 53.05,81.6 53.9,82.45 53.9,124.425 54.35,124.875 LCD.33
18: IDC50.18 LCD.02 | length 74.6
  Top Layer w0.254: IDC50.18 39.885,82.615 40.419,83.149 58.346,83.149 96.325,121.128 LCD.02
19: IDC50.19 LCD.04 | length 69
  Top Layer w0.254: IDC50.19 58.629,84.15 93.785,119.306 LCD.04
20: IDC50.20 LCD.06 | length 70.6
  Top Layer w0.254: IDC50.20 39.875,84.16 39.875,85.203 40.361,85.689 59.45,85.689 91.245,117.484 LCD.06
21: IDC50.21 LCD.08 | length 65
  Top Layer w0.254: IDC50.21 42.44,86.675 59.717,86.675 88.705,115.663 LCD.08
22: IDC50.22 LCD.10 | length 66.6
  Top Layer w0.254: IDC50.22 39.885,87.735 40.3,88.15 60.474,88.15 86.165,113.841 LCD.10
23: IDC50.23 LCD.12 | length 61
  Top Layer w0.254: IDC50.23 60.835,89.23 83.625,112.02 LCD.12
24: IDC50.24 LCD.14 | length 62.7
  Top Layer w0.254: IDC50.24 39.885,90.348 40.306,90.769 61.656,90.769 81.085,110.198 LCD.14
25: IDC50.25 LCD.16 | length 57
  Top Layer w0.254: IDC50.25 61.938,91.77 78.545,108.377 LCD.16
26: IDC50.26 LCD.18 | length 58.6
  Top Layer w0.254: IDC50.26 39.885,92.828 40.366,93.309 62.759,93.309 76.005,106.555 LCD.18
27: IDC50.27 LCD.20 | length 43.5
  Top Layer w0.254: IDC50.27 42.46,94.275 46.725,94.275 73.465,121.015 LCD.20
28: IDC50.28 LCD.22 | length 45.1
  Top Layer w0.254: IDC50.28 39.875,94.32 39.875,95.325 40.375,95.825 47.557,95.825 70.925,119.193 LCD.22
29: IDC50.29 LCD.24 | length 39.4
  Top Layer w0.254: IDC50.29 47.863,96.85 68.385,117.372 LCD.24
30: IDC50.30 LCD.26 | length 41
  Top Layer w0.254: IDC50.30 39.885,97.785 40.375,98.275 48.57,98.275 65.845,115.55 LCD.26
31: IDC50.31 LCD.28 | length 35.4
  Top Layer w0.254: IDC50.31 42.46,99.425 49.001,99.425 63.305,113.729 LCD.28
32: IDC50.32 LCD.30 | length 37
  Top Layer w0.254: IDC50.32 39.941,99.446 39.941,100.241 40.629,100.929 44.695,100.929 44.716,100.95 49.808,100.95 60.765,111.907 LCD.30
33: IDC50.33 LCD.32 | length 31.5
  Top Layer w0.254: IDC50.33 42.48,101.875 50.014,101.875 58.225,110.086 LCD.32
34: IDC50.34 LCD.34 | length 33
  Top Layer w0.254: IDC50.34 39.902,101.947 39.902,102.782 40.595,103.475 42.004,103.475 42.01,103.469 42.84,103.469 42.846,103.475 50.896,103.475 55.685,108.264 LCD.34
35: 2000.3 2000.4 Down.3 Down.4 IDC50.35 Right.3 Right.4 SW.06 | length 222.8
  Top Layer w0.254: v1(52.575,123.2) 52.575,124.925 56.125,128.475 104.675,128.475 109.225,123.925 118.925,123.925 Right.3 Right.4 127.025,123.875 128.925,121.975 128.925,117.975 Down.4 Down.3 ; 2000.4 2000.3
  Bottom Layer w0.254: IDC50.35 50.445,104.47 52.625,106.65 52.625,123.15 v1(52.575,123.2) ; Down.4 131.7,117.925 133.275,116.35 133.275,98.075 147.325,84.025 147.325,80.25 146.11,79.035 SW.06 124.675,79.01 124.675,72.475 134.475,62.675 2000.4
36: 1000.1 1000.2 1500.1 1500.2 2000.1 2000.2 IDC50.36 SW.02 | length 200.4
  Top Layer w0.254: IDC50.36 39.84,104.425 38.1,104.425 35.85,102.175 35.85,58.175 43.15,50.875 97.575,50.875 104.875,58.175 1000.1 122.025,58.175 ; SW.02 122.395,89.195 120.35,87.15 120.35,59.85 122.025,58.175 ; 2000.1 2000.2 1500.1 1500.2 122.025,58.175
37: 1500.3 1500.4 Back.3 Back.4 IDC50.37 SW.05 UP.3 UP.4 | length 223.5
  Top Layer w0.254: v1(37.45,101.15) 37.4,101.1 37.4,71.75 39.125,70.025 v1(61.925,70.025) ; UP.4 UP.3 ; 1500.4 1500.3 130.5,62.7 134.875,62.7 140.875,68.7 Back.4 Back.3 SW.05
  Bottom Layer w0.254: v1(37.45,101.15) 37.45,104.775 38.225,105.55 41.825,105.55 42.425,106.15 IDC50.37 ; v1(61.925,70.025) 63.75,70.025 106.15,112.425 UP.4 109.075,94.15 121.6,81.625 124.65,81.625 SW.05
38: Back.1 Back.2 Enter.1 Enter.2 IDC50.38 Right.1 Right.2 SW.03 | length 211.5
  Top Layer w0.254: IDC50.38 37.365,107.01 36.125,108.25 36.125,130.75 39.975,134.6 v1(119,134.6) ; Right.1 Right.2 128.657,128.375 145.375,111.657 Enter.1 Enter.2 Back.1 Back.2
  Bottom Layer w0.254: Right.1 119,128.4 v1(119,134.6) ; SW.03 142.57,86.655 145.375,83.85 Back.1
39: 1000.3 1000.4 Enter.3 Enter.4 IDC50.39 Left.3 Left.4 SW.04 | length 199.4
  Top Layer w0.254: IDC50.39 46.175,109.55 50.013,113.388 50.013,118.17 55.243,123.401 99.674,123.401 104.525,118.55 104.525,111.9 113.45,102.975 Left.3 ; 1000.4 1000.3 117.125,62.675 118.975,64.525 Left.3 ; SW.04 124.765,84.05 135.475,84.05 140.875,89.45 Enter.4 Enter.3 136.8,99.45 133.275,102.975 Left.4 Left.3
40: Down.1 Down.2 IDC50.40 Left.1 Left.2 SW.01 UP.1 UP.2 | length 170
  Top Layer w0.254: UP.1 UP.2 113.575,110.475 116.575,107.475 Left.1 Left.2 127.925,107.475 128.975,108.525 Down.2 Down.1
  Bottom Layer w0.254: IDC50.40 38.1,109.55 36.475,111.175 36.475,131.45 39.25,134.225 100.95,134.225 113.575,121.6 UP.1 ; SW.01 127.11,91.735 130.1,94.725 130.1,104.925 127.55,107.475 Left.2
41: IDC50.41 J1.01 J1.02 | length 119.2
  Top Layer w0.254: IDC50.41 46.54,112.09 49.233,114.783 49.233,124.54 56.852,132.159 125.591,132.159 134.89,122.86 J1.02 J1.01
42: IDC50.42 J1.03 J1.04 | length 143.1
  Top Layer w0.254: IDC50.42 37.91,112.09 36.633,113.367 36.633,130.233 39.575,133.175 143,133.175 147.125,129.05 147.125,126.375 146.15,125.4 J1.03 J1.04
43: IDC50.43 J1.05 J1.06 | length 115.5
  Top Layer w0.254: IDC50.43 46.805,114.63 48.725,116.55 48.725,124.75 56.642,132.667 134.533,132.667 139.26,127.94 J1.06 J1.05
45: IDC50.14
46: IDC50.46
47: IDC50.47
48: IDC50.48
49: IDC50.49
50: IDC50.50
+12: 
Gnd: IDC50.45 LCD.27 | length 26.7
  Bottom Layer w0.254: IDC50.45 44.445,117.17 54.325,127.05 62.625,127.05 63.305,126.37 LCD.27
  other v1: 35,50 40,50 100,50 105,50 110,50 115,50 120,50 125,50 130,50 135,50 140,50 145,50 37.5,55 42.5,55 52.5,55 57.5,55 62.5,55 67.5,55 72.5,55 77.5,55 82.5,55 87.5,55 92.5,55 97.5,55 107.5,55 117.5,55 122.5,55 127.5,55 137.5,55 142.5,55 147.5,55 45,60 50,60 60,60 65,60 70,60 75,60 80,60 85,60 90,60 100,60 105,60 110,60 125,60 135,60 140,60 37.5,65 57.5,65 62.5,65 67.5,65 72.5,65 77.5,65 82.5,65 87.5,65 92.5,65 97.5,65 102.5,65 107.5,65 112.5,65 117.5,65 122.5,65 127.5,65 142.5,65 147.5,65 70,70 75,70 80,70 85,70 90,70 95,70 100,70 105,70 110,70 115,70 125,70 130,70 135,70 145,70 72.5,75 77.5,75 82.5,75 87.5,75 92.5,75 97.5,75 102.5,75 107.5,75 112.5,75 117.5,75 122.5,75 127.5,75 132.5,75 137.5,75 147.5,75 60,80 70,80 80,80 85,80 90,80 95,80 100,80 105,80 110,80 115,80 82.5,85 87.5,85 92.5,85 97.5,85 102.5,85 107.5,85 112.5,85 122.5,85 142.5,85 70,90 80,90 90,90 95,90 100,90 105,90 110,90 115,90 120,90 130,90 135,90 52.5,95 62.5,95 92.5,95 97.5,95 102.5,95 107.5,95 112.5,95 117.5,95 122.5,95 127.5,95 132.5,95 142.5,95 147.5,95 55,100 100,100 105,100 115,100 120,100 125,100 62.5,105 102.5,105 107.5,105 117.5,105 122.5,105 127.5,105 137.5,105 142.5,105 147.5,105 35,110 50,110 100,110 120,110 125,110 130,110 135,110 140,110 97.5,115 102.5,115 107.5,115 112.5,115 117.5,115 122.5,115 127.5,115 137.5,115 147.5,115 35,120 45,120 100,120 105,120 120,120 125,120 130,120 135,120 140,120 145,120 42.5,125 47.5,125 102.5,125 112.5,125 117.5,125 122.5,125 127.5,125 137.5,125 147.5,125 35,130 40,130 45,130 60,130 65,130 70,130 75,130 80,130 85,130 90,130 95,130 100,130 115,130 125,130 130,130 140,130
NetLCD_01: 
NetLCD_02: 
NetLCD_03: 
NetLCD_04: 
NetLCD_05: 
NetLCD_06: 
NetLCD_07: 
NetLCD_08: 
NetLCD_09: 
NetLCD_10: 
NetLCD_11: 
NetLCD_12: 
NetLCD_13: 
NetLCD_14: 
NetLCD_15: 
NetLCD_16: 
NetLCD_17: 
NetLCD_18: 
NetLCD_19: 
NetLCD_20: 
NetLCD_21: 
NetLCD_22: 
NetLCD_23: 
NetLCD_24: 
NetLCD_25: 
NetLCD_26: 
NetLCD_27: 
NetLCD_28: 
NetLCD_29: 
NetLCD_30: 
NetLCD_31: 
NetLCD_32: 
NetLCD_33: 
NetLCD_34: 
Netsw2_3: 
Netsw6_3: 
Netsw7_3: 
Netxh7_1: 
Netxh7_2: 
Netxh7_3: 
Netxh7_4: 
Netxh7_5: 
Netxh7_6: 
Netxh7_7: 
Netzk_61: 
Netzk_62: 
Netzk_63: 
Netzk_64: 
Netzk_65: 
Netzk_66: 
Netzk_67: 
Netzk_68: 
Netzk_69: 
Netzk_70: 
Netzk_71: 
Netzk_72: 
Netzk_73: 
Netzk_74: 
Netzk_77: 
Netzk_78: 
Out+: 
Out-: 
Vdd: IDC50.44

## Polygon pours and split planes (outlines as drawn)
Gnd on Bottom Layer "GND_L02_P001" (solid, pour order 1): 32.775,136.075 149.975,136.075 149.975,47.475 32.775,47.475
Gnd on Top Layer "GND_L01_P000" (solid, pour order 0): 32.775,136.075 149.975,136.075 149.975,47.475 32.775,47.475

## Silkscreen, mask and mechanical layers (free items; w line width, h text height)
Top Overlay:
  drawing of 3 lines, arcs and shapes, not listed
  text "CTRL BOARD" at 83.829,96.004 h1.52
Mechanical 1:
  circle w0.013: c48.375,54.775 r1.25
  circle w0.013: c134.375,54.775 r1.25
  circle w0.013: c110.375,128.775 r1.25
  circle w0.013: c134.375,128.775 r1.25
  circle w0.013: c48.375,128.775 r1.25
  circle w0.013: c110.375,54.775 r1.25
  circle w0.013: c56.4,58.4 r1.725
  circle w0.013: c95.35,58.4 r1.725
  lines w0.013: 32.775,47.475 149.975,47.475 149.975,136.075 32.775,136.075 32.775,47.475 ; 36.775,50.365 36.775,133.185 45.275,133.185 45.275,50.365 36.775,50.365 ; 50.375,52.575 50.375,130.975 101.375,130.975 101.375,52.575 50.375,52.575 ; 52.275,61.075 52.275,121.575 95.275,121.575 95.275,61.075 52.275,61.075 ; 108.375,57.475 114.275,57.475 114.275,63.375 108.375,63.375 108.375,57.475 ; 108.375,112.725 108.375,118.625 114.275,118.625 114.275,112.725 108.375,112.725 ; 119.275,102.275 125.175,102.275 125.175,108.175 119.275,108.175 119.275,102.275 ; 119.275,123.175 125.175,123.175 125.175,129.075 119.275,129.075 119.275,123.175 ; 124.275,57.475 130.175,57.475 130.175,63.375 124.275,63.375 124.275,57.475 ; 129.275,112.725 135.175,112.725 135.175,118.625 129.275,118.625 129.275,112.725 ; 139.975,121.725 144.975,121.725 144.975,129.075 139.975,129.075 139.975,121.725 ; 140.175,57.475 146.075,57.475 146.075,63.375 140.175,63.375 140.175,57.475 ; 140.175,75.375 146.075,75.375 146.075,81.275 140.175,81.275 140.175,75.375 ; 140.175,93.275 140.175,99.175 146.075,99.175 146.075,93.275 140.175,93.275